# Altium PCB 6C-4L-1550um.PcbDoc
Units mm, origin at the board's own origin, x right, y up, seen from the top; angles counter-clockwise.
Board outline 63.83 x 29.23 mm, 4 copper layers (Top Layer, Mid-Layer 1, Mid-Layer 2, Bottom Layer), stack 1.536 mm thick; 82 components, 63 nets, 283 pads, 116 vias.
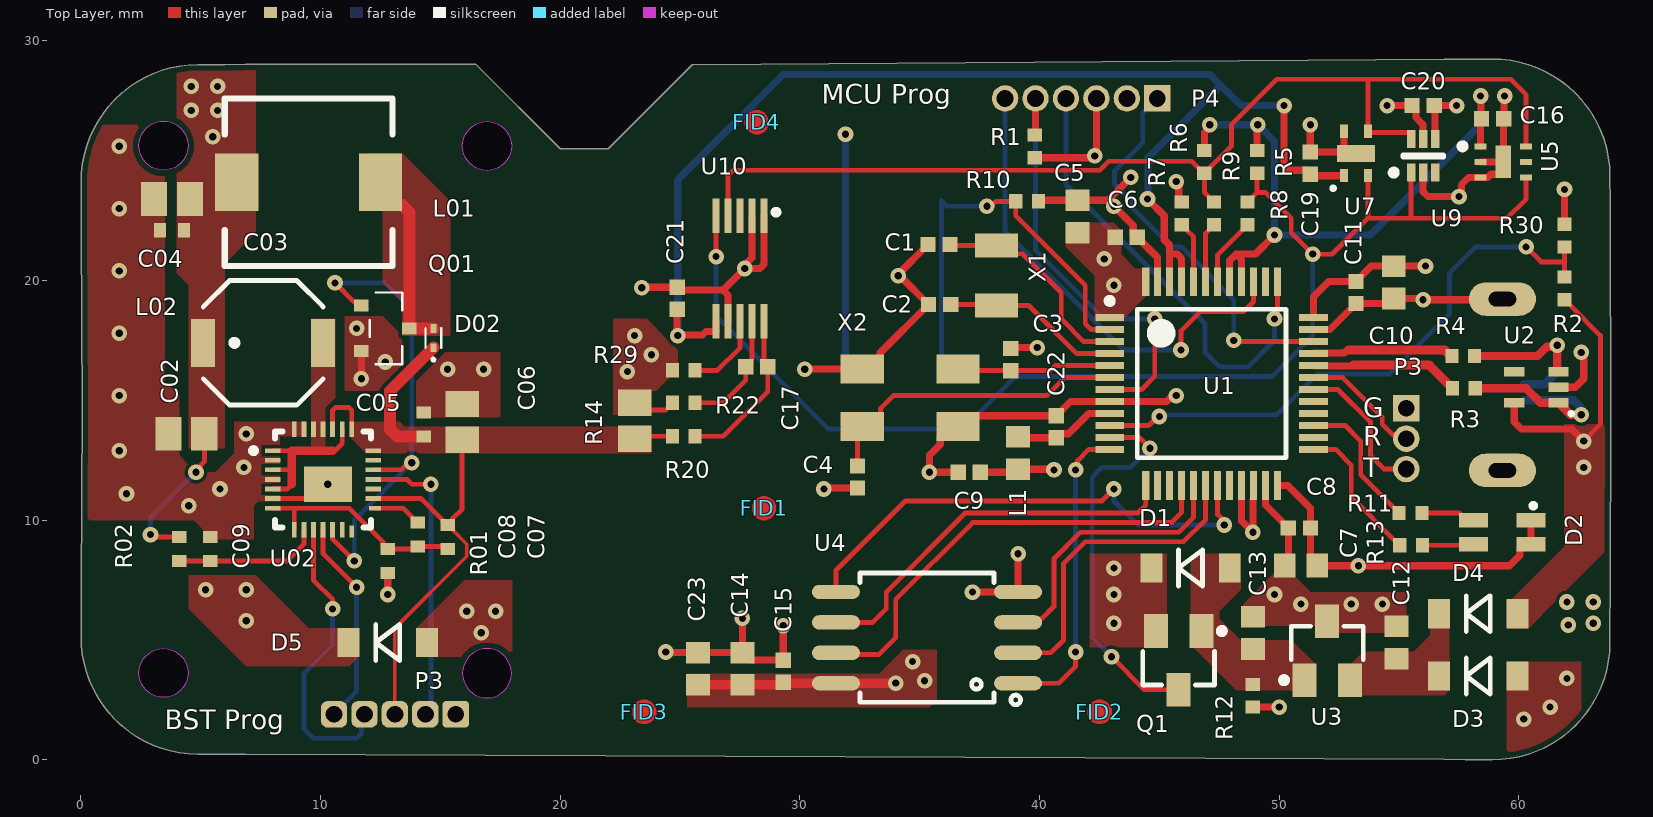
[diagram p0: Top Layer view]
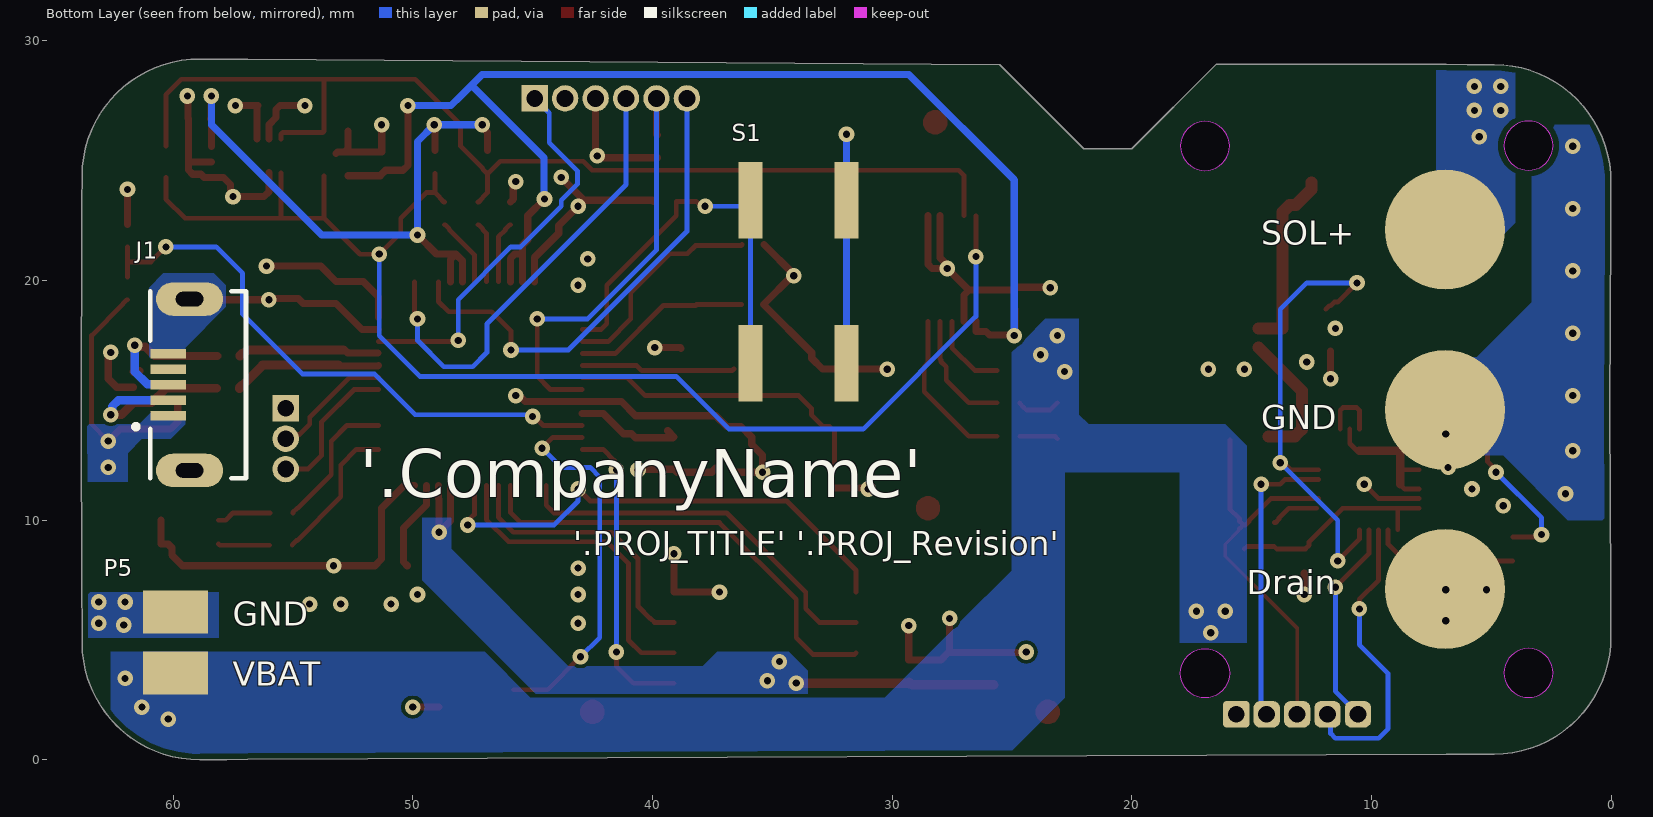
[diagram p1: Bottom Layer view, seen from below]
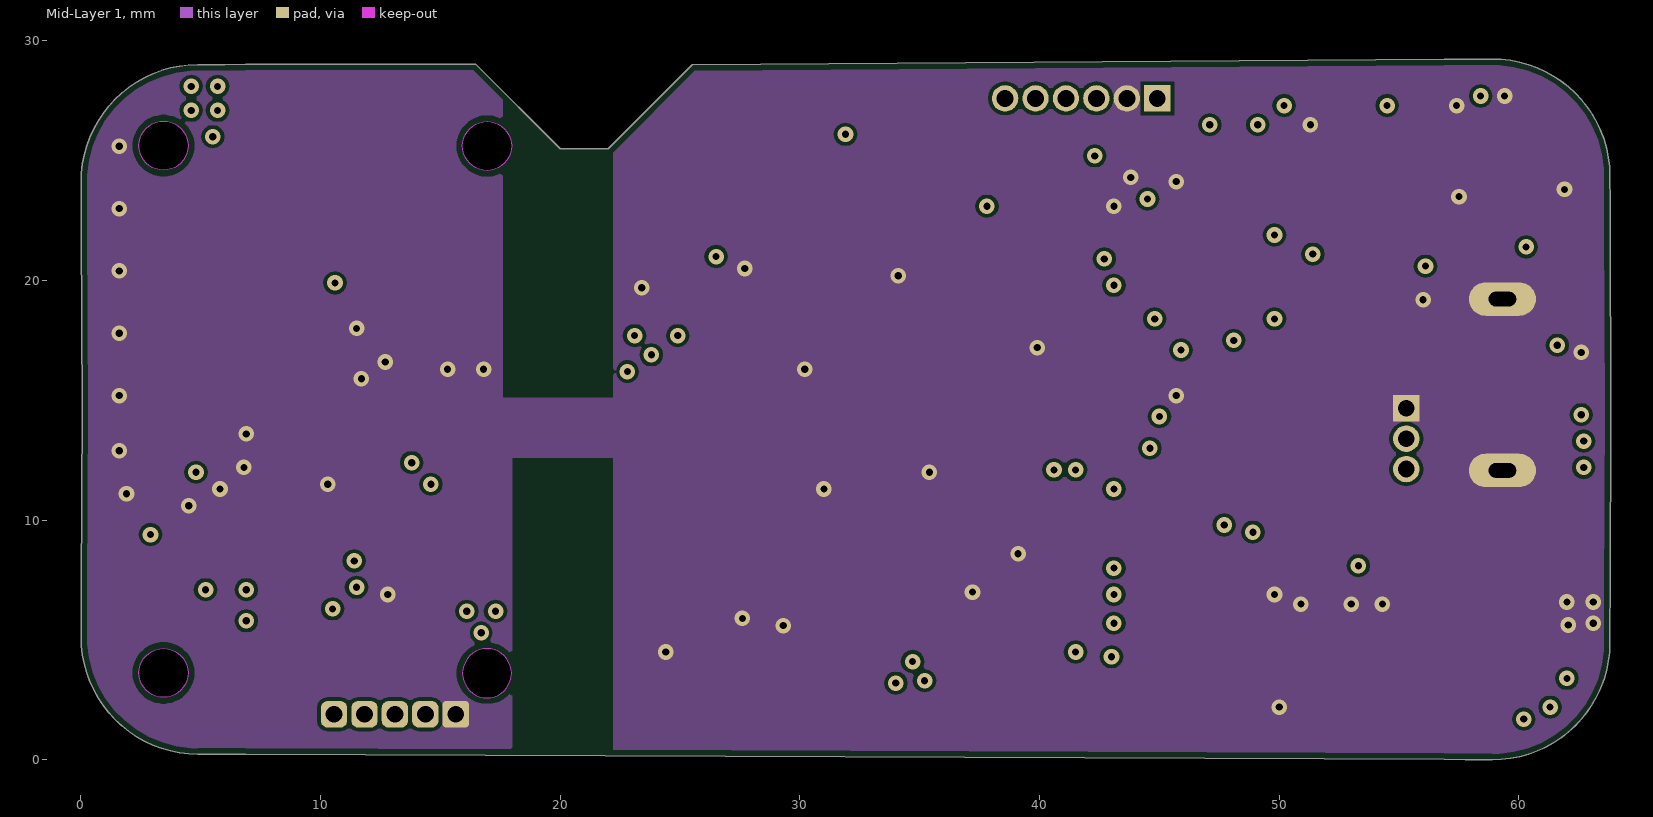
[diagram p2: Mid-Layer 1]
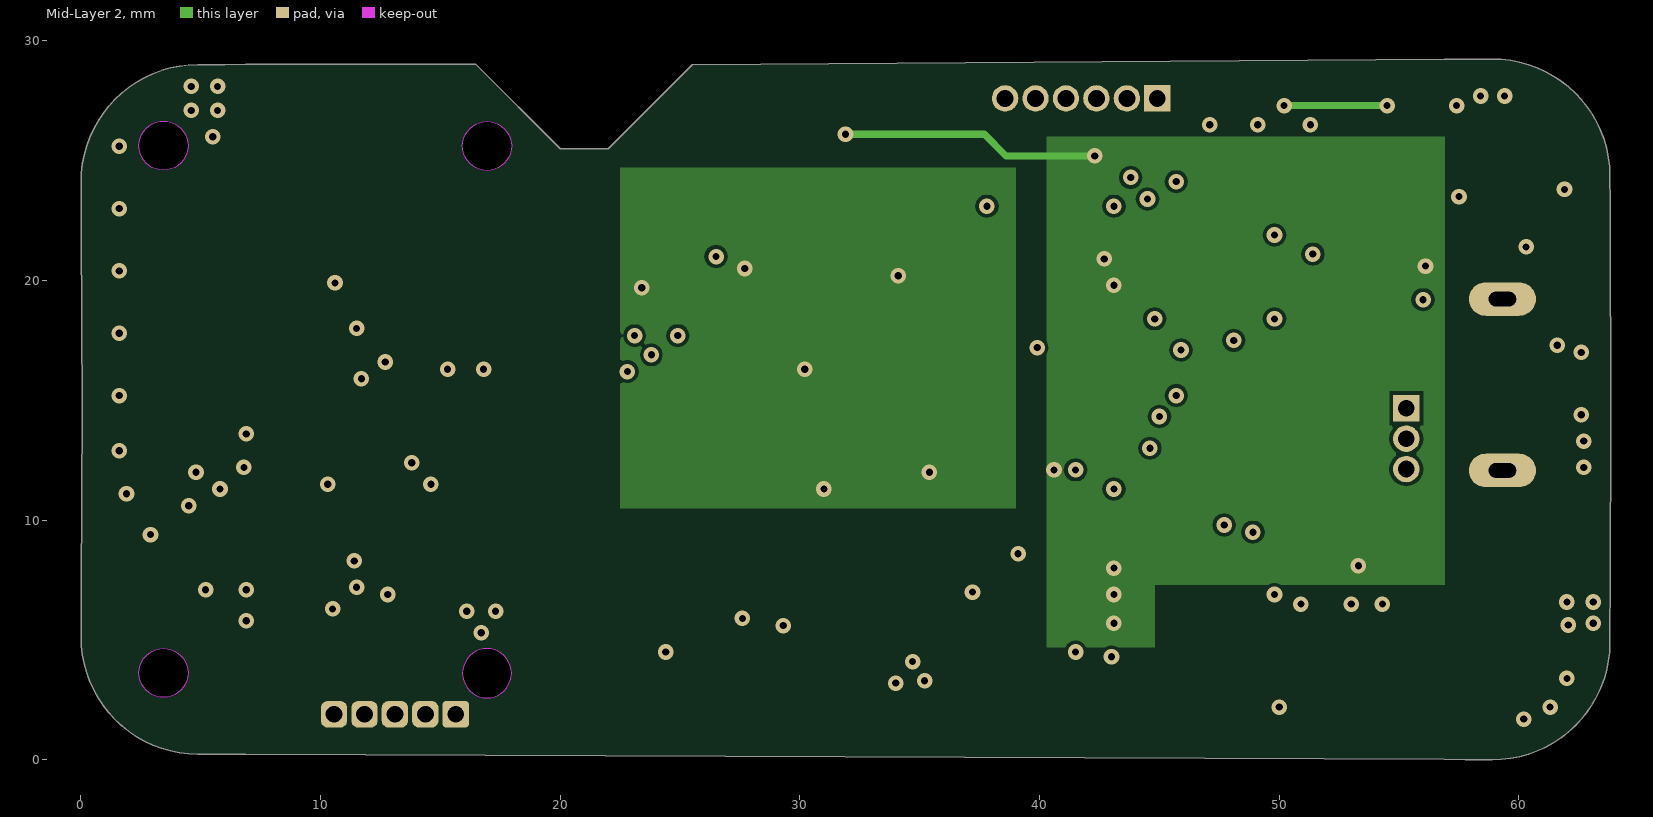
[diagram p3: Mid-Layer 2]

## Layer stack, top to bottom
Top Solder: solder mask 0.0102, Solder Resist, Dk 3.5
Top Layer: signal copper 0.018
Dielectric1: prepreg 0.36, FR-4, Dk 4.8
Mid-Layer 1: signal copper 0.035
Dielectric2: core 0.71, FR-4, Dk 4.8
Mid-Layer 2: signal copper 0.035
Dielectric3: prepreg 0.36, FR-4, Dk 4.8
Bottom Layer: signal copper 0.018
Bottom Solder: solder mask 0.0102, Solder Resist, Dk 3.5

## Board outline
0.006,5.149 0.013,6.268 0.017,7.151 0.049,14.622 0.017,22.093 0.012,23.216 0.006,24.095 cw(c4.896,24.119) 4.878,29.009 5.998,29.011 6.881,29.015 6.878,29.018 ccw(c6.881,29.018) 6.884,29.018 16.482,29.018 20,25.5 22,25.5 25.503,29.003 56.881,29.227 58.004,29.232 58.883,29.237 cw(c58.907,24.348) 63.797,24.365 63.799,23.246 63.803,22.363 63.836,14.622 63.803,6.881 63.799,5.757 63.797,4.878 cw(c58.907,4.896) 58.883,0.006 57.764,0.013 56.881,0.017 6.881,0.229 5.757,0.233 4.878,0.235 cw(c4.896,5.125)
cut-out: 3.444,2.602 cw(c3.444,3.627) 2.419,3.627 cw(c3.444,3.627) 3.444,4.652 cw(c3.444,3.627) 4.469,3.627 cw(c3.444,3.627)
cut-out: 15.919,3.613 ccw(c16.944,3.613) 16.944,2.588 ccw(c16.944,3.613) 17.969,3.613 ccw(c16.944,3.613) 16.944,4.638 ccw(c16.944,3.613)
cut-out: 16.944,24.588 cw(c16.944,25.613) 15.919,25.613 cw(c16.944,25.613) 16.944,26.638 cw(c16.944,25.613) 17.969,25.613 cw(c16.944,25.613)
cut-out: 3.444,24.603 cw(c3.444,25.628) 2.419,25.628 cw(c3.444,25.628) 3.444,26.653 cw(c3.444,25.628) 4.469,25.628 cw(c3.444,25.628)

## Design rules (kind name [scope] priority, off if disabled: settings)
BoardOutlineClearance [All] p1: gap=0.25 ignorepadtopadclearanceinfootprint=FALSE except(0: Arc-SplitContinuation Track-SplitContinuation SMDPad-SplitContinuation THPad-SplitContinuation Via-SplitContinuation Fill-SplitContinuation Poly-SplitContinuation Region-SplitContinuation Text-SplitContinuation)
Clearance Clearance-xPP-xTP-xTT [All] p1: gap=0.15 ignorepadtopadclearanceinfootprint=FALSE except(0: Arc-Hole Track-Hole SMDPad-Hole THPad-Hole Via-Hole Fill-Hole Poly-Hole Region-Hole Text-Hole)
ComponentClearance [All] p1: gap=0.25 collisioncheckmode=3 verticalgap=0.25 showdistances=FALSE
DiffPairsRouting [All] p1: maxlimit=0.25 minlimit=0.25 mostfreqgap=0.25 toplayer_minwidth=0.2 toplayer_maxwidth=0.381 toplayer_prefwidth=0.381 midlayer1_minwidth=0.2 midlayer1_maxwidth=0.381 midlayer1_prefwidth=0.381 midlayer2_minwidth=0.2 midlayer2_maxwidth=0.381 midlayer2_prefwidth=0.381 bottomlayer_minwidth=0.2 bottomlayer_maxwidth=0.381 bottomlayer_prefwidth=0.381 maxuncoupledlength=12.5
Height [All] p1: minheight=0 maxheight=25 prefheight=12.5
HoleSize HoleSize-PTH [All] p1: absolutevalues=TRUE maxlimit=2 minlimit=0.25 maxpercent=80.000 minpercent=20.000
HoleToHoleClearance [All] p1: gap=0.35 allowstackedmicrovias=TRUE
MinimumAnnularRing "Minimum IAR  >0.45mm" [((ObjectKind = 'Pad') OR (ObjectKind = 'Via')) And (Layer = 'MultiLayer') And (HoleDiameter > AsMM(0.45))] p1: minimumring=0.175 // minimum inner annular ring for pads > 0.45mm finished hole size
MinimumAnnularRing "Minimum IAR <=0.45mm" [((ObjectKind = 'Pad') OR (ObjectKind = 'Via')) And (Layer = 'MultiLayer') And (HoleDiameter <= AsMM(0.45))] p2: minimumring=0.175 // minimum inner annular ring for pads <= 0.45mm finished hole size
MinimumSolderMaskSliver [All] p1: minsoldermaskwidth=0.08
PlaneClearance PlaneClearance-IPI [All] p1: clearance=0.25
PlaneConnect [All] p1: planeconnectstyle=Relief reliefexpansion=0.175 reliefentries=4 reliefconductorwidth=0.2 reliefairgap=0.2
PolygonConnect PolygonConnect-xTW [All] p1: connectstyle=Direct reliefconductorwidth=0.2 reliefentries=4 polygonreliefangle="90 Angle" airgapwidth=0.2
RoutingCorners [All] p1: cornerstyle=45-Degree minsetback=2.5 maxsetback=2.5
RoutingVias "RoutingVias > 0.45mm" [(ObjectKind = 'Via') And (HoleDiameter > AsMM(0.45))] p1: holewidth=0.5 width=0.85 viastyle="Through Hole" minholewidth=0.5 minwidth=0.85 maxholewidth=0.9 maxwidth=1.25 // finishet hole size > 0.45mm
RoutingVias "RoutingVias <= 0.45mm" [(ObjectKind = 'Via') And (HoleDiameter <= AsMM(0.45))] p2: holewidth=0.3 width=0.65 viastyle="Through Hole" minholewidth=0.25 minwidth=0.6 maxholewidth=0.45 maxwidth=0.8 // finishet hole size <= 0.45mm
SilkToSilkClearance [All] p1: silktosilkclearance=0.2
SilkToSolderMaskClearance SilkscreenOverComponentPads [IsPad] p1: minsilkscreentomaskgap=0.2 clearancetoexposedcopper=TRUE
SolderMaskExpansion [All] p1: expansion=0 istentingtop=FALSE
UnRoutedNet [All] p1: checkbadconnections=TRUE
Width Width-xTW [All] p1: maxlimit=1.5 minlimit=0.15 preferedwidth=0.2
18 further rules are at their usual default settings.

## Classes and differential pairs
differential pair USB: +USB_P -USB_N

## Components (designator, comment, footprint, x,y, rotation, side; value= is the part's Value field where it differs from the comment)
C1 "" CAP0402 35.8,21.5 r0 top
C2 "" CAP0402 35.825,19 r0 top
C02 "Cap_0805" 0805 4.4,13.6 r0 top value=22uF
C3 "" CAP0402 38.8,16.7 r270 top
C03 "Cap_0805" 0805 3.8,23.4 r0 top value=22uF
C4 "" CAP0402 32.4,11.8 r90 top
C04 "Cap_0402" 0402 3.8,22.1 r0 top value=100nF
C5 "" CAP0603 41.575,22.676 r270 top
C05 "Cap_0402" 0402 14.3,14 r270 top value=100nF
C6 "" CAP0402 43.615,21.801 r180 top
C06 "Cap_0805" 0805 15.9,14.1 r270 top value=22uF
C7 "" CAP0603 50.9,8.1 r0 top
C07 "Cap_0402" 0402 15.301,9.3 r90 top value=100nF
C8 "" CAP0402 50.84,9.675 r0 top
C08 "Cap_0402" 0402 14.05,9.4 r90 top value=470nF
C9 "" CAP0402 37.06,12 r0 top
C09 "Cap_0402" 0402 5.4,8.8 r270 top value=100nF
C10 "" CAP0603 54.775,19.925 r90 top
C11 "" CAP0402 53.2,19.5 r90 top
C12 "" CAP0603 54.9,4.9 r270 top
C13 "" CAP0603 48.9,5.3 r270 top
C14 "" CAP0603 27.6,3.8 r270 top
C15 "" CAP0402 29.3,3.7 r270 top
C16 "" CAP0402 58.9,26.75 r180 top
C17 "" CAP0402 28.2,16.4 r0 top
C19 "" CAP0402 51.288,24.9 r270 top
C20 "" CAP0402 56,27.3 r180 top
C21 "" CAP0402 24.875,19.26 r270 top
C22 "" CAP0402 40.7,13.9 r270 top
C23 "" CAP0603 25.75,3.8 r270 top
D1 "Alternative ON BAT54T1GOSCT-ND" "SOD123 SODFL360X130-2N" 46.3,8 r180 top
D2 "" KPTBD-3216SURKCGKC 58.1,10 r0 top
D02 "NSR0140P2" SOD-923 14.7,17.2 r90 top
D3 "Alternative ON BAT54T1GOSCT-ND" "SOD123 SODFL360X130-2N" 58.3,3.5 r180 top
D4 "Alternative ON BAT54T1GOSCT-ND" "SOD123 SODFL360X130-2N" 58.3,6.1 r180 top
D5 "Alternative ON BAT54T1GOSCT-ND" "SOD123 SODFL360X130-2N" 12.8,4.9 r180 top
FID1 "Fiducial" FIDUCIAL_02_small 28.5,10.5 r90 top
FID2 "Fiducial" FIDUCIAL_02_small 42.5,2 r90 top
FID3 "Fiducial" FIDUCIAL_02_small 23.5,2 r90 top
FID4 "Fiducial" FIDUCIAL_02_small 28.2,26.6 r90 top
J1 "USB3140-30-0170-1-C_REVE1" GCT_USB3140-30-0170-1-C_REVE1 58.95,15.65 r90 bottom
L1 "" CAP0603 39.1,12.8 r90 top
L01 "SRR7045-102M" SRR7045-102M 6.5,24.1 r0 top value=X
L02 "SD53-4R7-R" SD53-4R7-R 7.6,17.4 r0 top value=X
P3 "" "Header 1x3 1.27" 55.3,14.67 r270 top
P3 "1x5 Header" "1x5 Header 1.27" 15.64,1.9 r180 top
P4 "" "Header 1x6 1.27" 44.91,27.6 r180 top
P5 "" "2x1 blank pads_2" 59.9,4.9 r90 bottom
Q1 "" SOT23-3 45.8,4 r270 top
Q01 "PMV130ENE" SOT-23 11.7,18.95 r270 top
R1 "" RES0402 39.8,25.6 r270 top
R01 "Res_0402" 0402 12.8,8.3 r270 top value=0
R2 "" RES0402 61.9,19.675 r270 top
R02 "Res_0402" 0402 4.1,8.8 r270 top value=51K
R3 "" RES0402 57.7,15.5 r0 top
R4 "" RES0402 57.675,16.85 r0 top
R5 "" RES0402 49.075,24.951 r90 top
R6 "" RES0402 46.875,24.951 r90 top
R7 "" RES0402 45.925,22.801 r270 top
R8 "" RES0402 48.674,22.801 r270 top
R9 "" RES0402 47.275,22.801 r270 top
R10 "" RES0402 39.475,23.3 r180 top
R11 "" RES0402 55.475,10.3 r180 top
R12 "" RES0402 48.9,2.675 r90 top
R13 "" RES0402 55.5,8.95 r180 top
R14 "Res_0805" 0805 23.1,14.15 r270 top value=1K
R20 "" RES0402 25.15,13.5 r0 top
R22 "" RES0402 25.15,14.9 r0 top
R29 "" RES0402 25.15,16.25 r0 top
R30 "" RES0402 61.9,21.875 r270 top
S1 "" EVQQ2W02W 31.9,16.55 r90 bottom
U1 "" TSQFP50P900X900X160-48N 47.175,15.701 r0 top
U2 "" "SC-70 5L" 61.65,14.9 r90 top
U02 "Sunboost 3" 28-QFN_0.4mm 8,12.9 r0 top
U3 "" SOT23-3 52,4.7 r90 top
U4 "" SO_8_W 35.3,5.1 r180 top
U5 "" OPT3001 58.4,25.6 r0 top
U7 "" SHTC3 52.7,24.375 r0 top
U9 "" SOTFL50P160X60-6N 56,25.2 r90 top
U10 "" VSSOP-10 27.5,20.6 r270 top
X1 "" FC-135 38.2,21.457 r270 top
X2 "" ABM3B 34.6,15.107 r180 top

## Footprints (in the part's own frame and the unit in brackets; to place one, negate y for a bottom-side part, rotate by r counter-clockwise, add the part's x,y. Pads: shape width x height; smd on the part's side, far side on the other; paste and mask are expansions set on the pad)
"1x5 Header 1.27" [mm]
  rrect25% 1.1x1.1 hole 0.7 paste+0 mask+0: 1(0,0)
  rrect50% 1.1x1.1 hole 0.7 paste+0 mask+0: 2(1.27,0) 3(2.54,0) 4(3.81,0) 5(5.08,0)
"2x1 blank pads_2" [mm]
  rect 1.8x2.7 smd: 1(-1.27,0) 2(1.27,0)
28-QFN_0.4mm [mm]
  rect 0.65x0.2 smd mask+0.05: 1(0,0) 2(0,-0.4) 3(0,-0.8) 4(0,-1.2) 5(0,-1.6) 6(0,-2) 7(0,-2.4) 16(4.2,-2) 17(4.2,-1.6) 18(4.2,-1.2) 19(4.2,-0.8) 20(4.2,-0.4) 21(4.2,0)
  rect 0.2x0.65 smd mask+0.05: 8(0.9,-3.3) 9(1.3,-3.3) 10(1.7,-3.3) 11(2.1,-3.3) 12(2.5,-3.3) 13(2.9,-3.3) 22(3.3,0.9) 23(2.9,0.9) 24(2.5,0.9) 25(2.1,0.9) 26(1.7,0.9) 27(1.3,0.9) 28(0.9,0.9)
  rect 0.2x0.5 smd mask+0.05: 14(3.3,-3.375)
  rect 0.5x0.2 smd mask+0.05: 15(4.275,-2.4)
  rect 2x1.5 smd mask+0.05: 29(2.3,-1.4)
  silkscreen extent -0.9,-3.2 4.1,0.8, body extent 0.1,-3.2 4.1,0.8, height 0.75
0402 [mm]
  rect 0.5x0.6 smd mask+0.05: 1(-0.5,0) 2(0.5,0)
  body extent -0.5,-0.25 0.5,0.25, height 0.25
0805 [mm] "Chip Capacitor, Body 2.0x1.3mm, IPC High Density"
  rect 1.1x1.4 smd: 1(-0.75,0) 2(0.75,0)
  body extent -1.1,-0.72 1.1,0.72, height 1.4
ABM3B [mm]
  rect 1.8x1.2 smd: 1(-2,-1.2) 2(2,-1.2) 3(2,1.2) 4(-2,1.2)
  body extent -2.5,-1.6 2.5,1.6, height 1.1
CAP0402 [mm]
  rect 0.64x0.64 smd: 1(-0.46,0) 2(0.46,0)
  body extent -0.55,-0.3 0.55,0.3, height 0.6
CAP0603 [mm]
  rect 0.9x1 smd: 1(-0.675,0) 2(0.675,0)
  body extent -0.87,-0.48 0.87,0.47, height 0.85
EVQQ2W02W [mm]
  rect 3.2x1 smd: 1(0,0) 2(6.8,0) 3(6.8,4) 4(0,4)
  body extent 0,-1 6.5,5, height 2.5
FC-135 [mm]
  rect 1x1.8 smd: 1(0,0) 2(2.5,0)
  body extent -0.35,-0.75 2.85,0.75, height 0.8
FIDUCIAL_02_small [mm]
  Top Layer region: 0,-0.5 -0.099,-0.5 -0.283,-0.424 -0.424,-0.283 -0.5,-0.099 -0.5,0 -0.5,0.099 -0.424,0.283 -0.283,0.424 -0.099,0.5 0,0.5 0.099,0.5 0.283,0.424 0.424,0.283 0.5,0.099 0.5,0 0.5,-0.099 0.424,-0.283 0.283,-0.424 0.099,-0.5 0,-0.5
  Top Layer pour cut-out: 0,-1 -0.098,-1 -0.292,-0.962 -0.474,-0.886 -0.637,-0.777 -0.777,-0.637 -0.886,-0.474 -0.962,-0.292 -1,-0.098 -1,0 -1,0.098 -0.962,0.292 -0.886,0.474 -0.777,0.637 -0.637,0.777 -0.474,0.886 -0.292,0.962 -0.098,1 0,1 0.098,1 0.292,0.962 0.474,0.886 0.637,0.777 0.777,0.637 0.886,0.474 0.962,0.292 1,0.098 1,0 1,-0.098 0.962,-0.292 0.886,-0.474 0.777,-0.637 0.637,-0.777 0.474,-0.886 0.292,-0.962 0.098,-1 0,-1
GCT_USB3140-30-0170-1-C_REVE1 [mm]
  rect 0.4x1.5 smd: 1(-1.3,1.25) 2(-0.65,1.25) 3(0,1.25) 4(0.65,1.25) 5(1.3,1.25)
  oval 1.4x2.8 hole 0.6 slot 1.15 at 90 deg mask+0: S1(-3.575,0.36) S2(3.575,0.36)
  silkscreen extent -3.9,-2 3.9,2.7
"Header 1x3 1.27" [mm]
  rect 1.1x1.1 hole 0.7: 1(0,0)
  round 1.1 hole 0.7: 2(1.27,0) 3(2.54,0)
"Header 1x6 1.27" [mm]
  rect 1.1x1.1 hole 0.7: 1(0,0)
  round 1.1 hole 0.7: 2(1.27,0) 3(2.54,0) 4(3.81,0) 5(5.08,0) 6(6.35,0)
KPTBD-3216SURKCGKC [mm]
  rect 1.2x0.6 smd: 1(2.4,0) 2(0,0) 3(2.4,-1) 4(0,-1)
  silkscreen extent 2.4,0.5 2.6,0.7, body extent -0.4,-1.3 2.8,0.3, height 1.8
OPT3001 [mm]
  rect 0.5x0.25 smd: 1(0,0) 2(0,-0.65) 3(0,-1.3) 4(1.9,-1.3) 5(1.9,-0.65) 6(1.9,0)
  rect 0.65x1.35 smd: 7(0.95,-0.65)
  silkscreen extent -0.87,-0.12 -0.63,0.12, body extent -0.05,-1.65 1.95,0.35, height 0.62
RES0402 [mm]
  rect 0.55x0.6 smd: 1(-0.475,0) 2(0.475,0)
  body extent -0.55,-0.3 0.55,0.3, height 0.4
"SC-70 5L" [mm]
  rect 0.4x0.85 smd: 1(0,0) 2(0.65,0) 3(1.3,0) 4(1.3,1.85) 5(0,1.85)
  silkscreen extent -0.51,-0.58 -0.4,-0.47, body extent -0.45,0.25 1.75,1.6, height 1.1
SD53-4R7-R [mm]
  rect 1x2 smd mask+0.05: 1(-2.5,0) 2(2.5,0)
  silkscreen extent -2.5,-2.6 2.5,2.6, body extent -2.6,-2.6 2.6,2.6, height 3
SHTC3 [mm]
  rect 0.35x0.55 smd: 1(0,0) 2(1,0) 3(1,1.85) 4(0,1.85)
  rect 1.6x0.7 smd: 5(0.5,0.925)
  silkscreen extent -0.51,-0.58 -0.4,-0.47, body extent -0.5,-0.07 1.5,1.93, height 0.75
SO_8_W [mm]
  oval 2x0.6 smd: 1(-3.8,1.905) 2(-3.8,0.635) 3(-3.8,-0.635) 4(-3.8,-1.905) 5(3.8,-1.905) 6(3.8,-0.635) 7(3.8,0.635) 8(3.8,1.905)
  silkscreen extent -3.9,-2.7 2.8,2.8, body extent -4.05,-2.73 4.05,2.73, height 1.75
"SOD123 SODFL360X130-2N" [mm]
  rect 0.91x1.22 smd: 1(-1.635,0) 2(1.635,0)
  silkscreen extent -0.5,-0.75 0.5,0.75, body extent -1.4,-0.85 1.4,0.85, height 1.3
SOD-923 [mm]
  rect 0.36x0.25 smd mask+0.05: 1(0,0) 2(0.8,0)
  silkscreen extent -0.52,-0.33 0.8,0.33, body extent -0.12,-0.32 0.93,0.32, height 0.43
SOT23-3 [mm]
  rect 1.4x1 smd: 1(-1.375,0.95) 2(-1.375,-0.95) 3(1.075,0)
  silkscreen extent -1.5,-1.5 0.87,1.93, body extent -1.7,-1.5 1.3,1.5, height 1.1
SOT-23 [mm]
  rect 0.5x0.6 smd mask+0.05: 1(0,0) 2(1.9,0) 3(0.95,2)
  silkscreen extent -0.55,0.35 2.45,1.7, body extent -0.55,-0.25 2.45,2.25, height 1.1
SOTFL50P160X60-6N [mm]
  rect 0.75x0.35 smd: 1(-0.7,0.5) 2(-0.7,0) 3(-0.7,-0.5) 4(0.7,-0.5) 5(0.7,0) 6(0.7,0.5)
  silkscreen extent -0.82,-0.85 0.05,1.35, body extent -0.85,-0.85 0.85,0.85, height 0.6
SRR7045-102M [mm]
  rect 1.8x2.4 smd mask+0.05: 1(0,0) 2(6,0)
  silkscreen extent -0.5,-3.5 6.5,3.5, body extent -0.5,-3.5 6.5,3.5, height 4.5
TSQFP50P900X900X160-48N [mm]
  rect 1.2x0.3 smd: 1(-4.25,2.75) 2(-4.25,2.25) 3(-4.25,1.75) 4(-4.25,1.25) 5(-4.25,0.75) 6(-4.25,0.25) 7(-4.25,-0.25) 8(-4.25,-0.75) 9(-4.25,-1.25) 10(-4.25,-1.75) 11(-4.25,-2.25) 12(-4.25,-2.75) 25(4.25,-2.75) 26(4.25,-2.25) 27(4.25,-1.75) 28(4.25,-1.25) 29(4.25,-0.75) 30(4.25,-0.25) 31(4.25,0.25) 32(4.25,0.75) 33(4.25,1.25) 34(4.25,1.75) 35(4.25,2.25) 36(4.25,2.75)
  rect 0.3x1.2 smd: 13(-2.75,-4.25) 14(-2.25,-4.25) 15(-1.75,-4.25) 16(-1.25,-4.25) 17(-0.75,-4.25) 18(-0.25,-4.25) 19(0.25,-4.25) 20(0.75,-4.25) 21(1.25,-4.25) 22(1.75,-4.25) 23(2.25,-4.25) 24(2.75,-4.25) 37(2.75,4.25) 38(2.25,4.25) 39(1.75,4.25) 40(1.25,4.25) 41(0.75,4.25) 42(0.25,4.25) 43(-0.25,4.25) 44(-0.75,4.25) 45(-1.25,4.25) 46(-1.75,4.25) 47(-2.25,4.25) 48(-2.75,4.25)
  silkscreen extent -4.37,-3.1 3.1,3.57, body extent -3.5,-3.5 3.5,3.5, height 1.6
VSSOP-10 [mm]
  rect 1.45x0.3 smd: 1(-2.1,1) 2(-2.1,0.5) 3(-2.1,0) 4(-2.1,-0.5) 5(-2.1,-1) 6(2.3,-1) 7(2.3,-0.5) 8(2.3,0) 9(2.3,0.5) 10(2.3,1)
  silkscreen extent -2.35,1.4 -2.15,1.6, body extent -2.35,-1.5 2.55,1.5, height 1.15

## Part data
C1 C2 C3 C4 C6 C8 C9 C11 C15 C16 C17 C19 C20 C21 C22: library part Cap, "Capacitor", Package=0402
  C1 C2: Specification=12p/10V
  C3 C4: Specification=18p/10V
  C6 C8 C9 C11 C15 C16 C17 C19 C20 C21 C22: Specification=100n/10V
C02 C03 C04 C05 C06 C07 C08 C09: "Capacitor", LatestRevisionDate=17-Jul-2002, LatestRevisionNote="Re-released for DXP Platform.", PackageDescription="Radial Cap, Thru-Hole; 2 Leads; 0.3 in Pin Spacing", PackageReference=RAD-0.3, Published=8-Jun-2000, Publisher="Altium Limited"
C5 C7 C10 C12 C13 C14 C23: library part Cap, "Capacitor", Package=0603
  C5 C7 C10 C12 C13: Specification=10µ/10V
  C14 C23: Specification=1µ/10V
D1 D3 D4 D5: library part "D Schottky", "Schottky Diode", Manufacturer=NEXPERIA, Manufacturer PN=BAT54GW, Package=SOD123, Specification=BAT54GW
D2: library part LED_RG, "Red/green LED", Manufacturer=KINGBRIGHT, Manufacturer PN=KPTBD-3216SURKCGKC, Package=SMD, Specification=KPTBD-3216SURKCGKC
D02: "Typical INFRARED GaAs LED", LatestRevisionDate=08-Jul-2005, LatestRevisionNote="Mech Layer 1 removed.", PackageDescription="LED; 2 Leads", PackageReference=LED-0, Published=8-Jun-2000, Publisher="Altium Limited"
J1: "USB - micro B USB 2.0 Receptacle Connector 5 Position Surface Mount, Through Hole", Package=None, Availability=Warning, Check_prices=https://www.snapeda.com/parts/USB3140-30-0170-1-C/Global%20Connector%20Technology/view-part/222535/?ref=eda, DigiKey-Purchase-URL=https://snapeda.com/shop?store=DigiKey&id=222535, MF="Global Connector Technology", MP=USB3140-30-0170-1-C, Price=None, SnapEDA_Link=https://www.snapeda.com/parts/USB3140-30-0170-1-C/Global%20Connector%20Technology/view-part/222535/?ref=snap
L1: library part Inductor, "Inductor", Manufacturer=MURATA, Manufacturer PN=BLM18AG601SN1D, Package=0603, Specification="600R 0.5A"
L01 L02: "Inductor"
P3: library part "Header 3", "Header, 3-Pin", Package=Hole, Specification="1.27 pitch"
P4: library part "Header 6", "Header, 6-Pin", Package=Hole, Specification="1.27 pitch"
P5: library part "Header 2", "Header, 2-Pin", Package=SMD, Specification="SMD Pads"
Q1: library part MOSFET-P, "P-Channel MOSFET", Manufacturer=ON, Manufacturer PN=FDN342P, Package=SOT-23, Specification=FDN342P
Q01: "N-Channel MOSFET", LatestRevisionDate=17-Jul-2002, LatestRevisionNote="Re-released for DXP Platform.", PackageDescription="TO, Flat Index; 3 In-Line, Axial Leads; Body Dia. 4.6mm; Lead Dia. 0.5 mm (max)", PackageReference=E3, PackageVersion=1995/1996, Published=8-Jun-2000, Publisher="Altium Limited"
R1 R2 R3 R4 R5 R6 R7 R8 R9 R10 R11 R12 R13 R20 R22 R29 R30: library part Res2, "Resistor", Package=0402
  R1 R2 R7 R10 R12 R30: Specification=10k
  R3 R4 R8 R9: Specification=0R
  R5 R6: Specification=4k7
  R11 R13: Specification=270R
  R20 R22: Specification=5R1
  R29: Specification=10R
R01 R02 R14: "Resistor", LatestRevisionDate=17-Jul-2002, LatestRevisionNote="Re-released for DXP Platform.", PackageDescription="Axial Device, Thru-Hole; 2 Leads; 0.4 in Pin Spacing", PackageReference=AXIAL-0.4, Published=8-Jun-2000, Publisher="Altium Limited"
S1: library part SW_EVQQ2, "Switch", Manufacturer=PANASONIC, Manufacturer PN=EVQQ2W02W, Package=SMD, Specification=EVQQ2W02W
U1: library part STM32L412CB_2, "MCU", Manufacturer=ST, Manufacturer PN=STM32L412CBT6, Package=LQFP-48, Specification=STM32L412CBT6
U2: library part RClamp0503F, "TVS array USB", Manufacturer=SEMTECH, Manufacturer PN=RClamp0503F.TCT, Package=SC70-5L, Specification=RClamp0503F
U02: "Initvation Sunboost 3"
U3: library part MCP1810TxxxTT, "3V3 LDO low iq", Manufacturer=MICROCHIP, Manufacturer PN=MCP1810T33ITT, Package=SOT23, Specification=MCP1810T33ITT
U4: library part MX25R6435F_SO8, "ULTRA LOW POWER, 64M-BIT FLASH MEMORY", Manufacturer=Macronix, Manufacturer PN=MX25R6435FM2IL0, Package=SOIC-8, Specification=MX25R6435F
U5: library part OPT3001, "Lux sensor", Manufacturer=TI, Manufacturer PN=OPT3001DNP, Package=DNP-6, Specification=OPT3001
U7: library part SHTC3, "SHTC3 RH sensor", Manufacturer=SENSIRION, Package=DFN, Manufacturer PN=SHTC3, Specification=SHTC3
U9: library part TMP112A, "Temp_Sensor", Manufacturer=TI, Manufacturer PN=TMP112AIDR, Package=SOT-563, Specification=TMP112
U10: "Current and power monitor", Manufacturer=TI, Manufacturer PN=INA226AIDGS, Package=VSSOP10, Specification=INA226A
X1: "32.768 kHz Crystal", Manufacturer=EPSON, Manufacturer PN="FC-135 32.7680KA-A5", Package=SMD, Specification="32.768 kHz"
X2: "Crystal", Manufacturer=ABRACON, Manufacturer PN=ABM3B-8.000MHZ-B2-T, Package=SMD, Specification="8 MHz"

## Free pads (board coordinates)
  round 5 smd far side: 4(6.925,22.125) 5(6.925,14.6) 6(6.925,7.125)

## Via types
v1: diameter 0.65, hole 0.3, Top Layer to Bottom Layer, tented both sides, 114 vias
v2: diameter 0.65, hole 0.3, Top Layer to Bottom Layer, 2 vias

## Nets (pads, with @x,y where several pads share a name; then routed paths per layer and width w, separated by ;. In a path a pad name is that pad's centre, name@x,y a point inside that pad or via, vN(x,y) a via of type N, cw(c..) or ccw(c..) an arc to the next point about the centre after c; other vN are vias at no path point)
5V_USB: D4.1 J1.1 R2.2 U2.5 | length 10.9
  Top Layer w0.2: R2.2 61.925,19.2 62.1,19.025 62.1,19 63.4,17.7 63.4,14 v1(62.7,13.3)
  Top Layer w0.3: U2.5 59.8,14.1 60.1,13.8 62.2,13.8 v1(62.7,13.3)
  other v1: 62.7,12.2
ACTIVATE_IV_MEASn: U1.20
BAT_Drain: D5.2 pad.6
  other v1: 6.9,5.8 5.2,7.1 6.9,7.1
BAT_MEAS: Q1.3 U1.11 | length 16
  Top Layer w0.2: U1.11 44.149,13.451 v1(44.6,13) ; v1(43,4.3) 44.375,2.925 Q1.3
  Bottom Layer w0.2: v1(43,4.3) 42.2,5.1 42.2,11.8 42.6,12.2 43.8,12.2 v1(44.6,13)
BUTTON: R10.2 S1.3 S1.4 U1.2 | length 17.5
  Top Layer w0.2: v1(37.8,23.1) 37.976,23.1 38.176,23.3 R10.2 39,22.7 41.9,19.8 41.9,18.2 42.149,17.951 U1.2
  Bottom Layer w0.2: S1.4 S1.3 36.15,23.1 v1(37.8,23.1)
DGND: C07.1 C08.1 R01.1 U02.7 U02.8 | length 9.1
  Top Layer w0.2: U02.7 8.9,10.5 ; U02.8 8.9,10.5 ; C07.1 15.201,8.9 C08.1 13.95,8.8 R01.1 12.75,8.8 12.6,8.95 12.6,9.1 11.2,10.5 8.9,10.5
EXT_BAT: D3.1 D5.1 P5.1 R14.1 R22.1 R29.1 | length 1.8
  Top Layer w0.2: R14.1 23.4,14.6 24.4,14.6 24.5,14.7 24.675,14.875 R22.1
  other v1: 60.2,1.7 61.3,2.2 62,3.4 16.7,5.3 16.1,6.2 17.3,6.2 22.8,16.2 23.8,16.9 23.1,17.7
FLASH_CS: U1.12 U4.1 | length 12.9
  Top Layer w0.2: U4.1 40.795,3.195 41.5,3.9 v1(41.5,4.5) ; v1(41.5,12.1) 41.586,12.186 41.586,12.486 42.051,12.951 U1.12
  Bottom Layer w0.2: v1(41.5,4.5) v1(41.5,12.1) v1@41.55,12.05
FLASH_SCLK: U1.13 U4.6 | length 16.2
  Top Layer w0.2: U4.6 33.035,5.735 33.6,6.3 33.6,7 36.9,10.3 44.1,10.3 44.425,10.625 U1.13
FLASH_SIO0: U1.19 U4.5 | length 21.2
  Top Layer w0.2: U4.5 31.5,7.9 34.4,10.8 42.6,10.8 v1(43.1,11.3) ; U1.19 47.425,10.242 47.7,9.967 v1(47.7,9.8)
  Bottom Layer w0.2: v1(43.1,11.3) 43.1,10.8 44.1,9.8 v1(47.7,9.8)
FLASH_SIO1: U1.18 U4.2 | length 13.4
  Top Layer w0.2: U4.2 40.465,4.465 41,5 41,8.2 41.9,9.1 46,9.1 46.925,10.025 U1.18
FLASH_SIO2: U1.17 U4.3 | length 11.6
  Top Layer w0.2: U4.3 39.908,5.735 40.065,5.892 40.092,5.892 40.6,6.4 40.6,8.4 41.7,9.5 45.8,9.5 46.425,10.125 U1.17
FLASH_SIO3: U1.16 U4.7 | length 19
  Top Layer w0.2: U4.7 31.565,4.4 33.3,4.4 34,5.1 34,6.7 37.2,9.9 45.5,9.9 45.925,10.325 U1.16
GND: C1.1 C2.1 C02.1 C03.1 C3.1 C04.1 C4.1 C5.1 C05.1 C6.1 C06.1 C7.1 C8.1 C9.1 C09.1 C10.1 C11.1 C12.1 C13.1 C14.1 C15.1 C16.1 C19.1 C20.1 C21.1 C22.1 C23.1 J1.5 J1.S1 J1.S2 P3.1 P4.2 P5.2 pad.5 Q01.2 R01.2 R7.1 R10.1 R12.1 R30.1 U1.8 U1.23 U1.35 U1.47 U2.2 U02.2 U02.4 U02.6 U02.27 U02.28 U02.29 U3.3 U4.4 U5.2 U5.3 U5.7 U7.4 U7.5 U9.2 U9.4 U10.1 U10.2 U10.7 X2.2 X2.4 | length 94.9
  Top Layer w0.2: U02.6 9.7,10.9 v1(10.3,11.5)
  Top Layer w0.3: v1(11.7,15.9) Q01.2 ; v1(12.8,6.9) R01.2 ; v1(23.4,19.7) 23.42,19.72 C21.1 24.995,19.6 26.8,19.6 ; v1(24.4,4.5) 24.425,4.475 C23.1 C14.1 ; U10.7 27,19.4 26.8,19.6 ; v1(27.6,5.9) C14.1 ; U10.2 28,20.949 27.7,20.649 v1(27.7,20.5) ; U10.1 28.5,20.676 28.331,20.507 27.707,20.507 v1(27.7,20.5) ; v1(29.3,5.6) C15.1 27.965,4.16 27.65,4.475 C14.1 ; v1(30.2,16.3) 30.207,16.307 X2.2 32.9,16.307 33.35,16.757 33.35,16.985 C2.1 34.165,20.2 v1(34.1,20.2) 34.1,20.26 C1.1 ; v1(31,11.3) 31.04,11.34 C4.1 ; C9.1 v1(35.4,12) 35.4,12.707 35.85,13.157 35.85,13.457 36.3,13.907 X2.4 36.9,13.907 37.353,14.36 C22.1 41.291,14.951 U1.8 45.302,14.951 45.551,15.2 v1(45.7,15.2) ; v1(37.2,7) 37.205,7.005 U4.4 v1(39.1,8.6) ; C3.1 38.84,17.2 v1(39.9,17.2) ; R10.1 40.001,23.351 C5.1 42.851,23.351 v1(43.8,24.3) ; v1(43.1,23.1) 43.905,22.295 43.905,21.971 C6.1 44.925,20.951 U1.47 ; v1(45.7,24.125) 45.805,24.02 45.805,23.395 R7.1 ; R12.1 v1(50,2.2) ; U1.23 49.425,10.63 C8.1 50.38,8.255 C7.1 ; v1(51.3,26.5) 51.288,26.488 C19.1 U7.5@52.84,25.36 ; U1.35 52.111,17.951 C11.1 54.565,19.04 C10.1 55.95,19.25 v1(56,19.2) 59.285,19.2 J1.S2 ; U7.4 52.7,25.5 U7.5@52.84,25.36 ; U7.5 53.14,25.36 U7.5@52.84,25.36 ; U9.2 56,23.7 56.2,23.5 v1(57.5,23.5) 57.605,23.605 57.605,24.005 57.9,24.3 U5.3 58.7,24.3 58.832,24.432 59.175,24.432 59.35,24.607 U5.7 ; U9.4 56.5,27.26 C20.1 v1(57.4,27.3) ; U5.2 U5.7 ; v1(59.4,27.7) 59.38,27.68 59.38,26.77 C16.1 59.35,26.74 U5.7 ; U2.2 62.35,15.55 62.7,15.9 62.7,16.9 v1(62.6,17) ; R30.1 v1(61.9,23.8) ; 26.8,19.6 v1(27.7,20.5)
  other v1: 62.057,5.627 63.1,5.7 50.9,6.5 53,6.5 54.3,6.5 62,6.584 63.1,6.584 49.8,6.9 4.5,10.6 1.9,11.1 5.8,11.3 6.8,12.2 1.6,12.9 6.9,13.6 1.6,15.2 15.3,16.3 16.8,16.3 12.7,16.6 1.6,17.8 11.5,18 1.6,20.4 1.6,23 1.6,25.6
I2C1_SCL: R5.1 R8.1 U5.4 U7.2 U9.1 U10.5 | length 55.6
  Top Layer w0.2: v1(26.5,21) U10.5 ; R8.1 48.699,23.276 48.874,23.451 48.874,23.476 49.075,23.676 ; R5.1 49.075,23.676 ; U7.2 53.7,22.6 ; U9.1 55.5,22.6 ; U5.4 60.3,23.4 59.5,22.6 55.5,22.6 ; 49.075,23.676 49.424,23.676 50.5,22.6 50.5,22 v1(51.4,21.1) 52.2,21.1 53.7,22.6 ; 53.7,22.6 55.5,22.6
  Bottom Layer w0.2: v1(26.5,21) 26.5,18.5 31.2,13.8 36.8,13.8 39,16 49.7,16 51.4,17.7 v1(51.4,21.1)
I2C1_SDA: R6.1 R9.1 U5.6 U7.3 U9.6 U10.4 | length 45.6
  Top Layer w0.2: U10.4 27,24.383 27.217,24.6 42.513,24.6 42.888,24.975 46.351,24.975 46.85,24.476 R6.1 ; R9.1 47.25,23.276 47.075,23.451 47.075,23.476 46.875,23.676 R6.1 ; U9.6 55.5,26.1 55.425,26.175 53.75,26.175 U7.3 53.7,28.4 ; U5.6 60.3,27.755 59.655,28.4 53.7,28.4 ; R6.1 46.9,24.476 47.075,24.651 47.075,24.676 48,25.601 48,26.5 49.9,28.4 53.7,28.4
I_MEAS: U1.14
ICSP: P3.2@14.37,1.9 U02.18 | length 12.6
  Top Layer w0.2: U02.18 13.6,11.7 13.8,11.5 v1(14.6,11.5)
  Bottom Layer w0.2: P3.2@14.13,2.14 14.37,1.9 14.6,2.13 v1(14.6,11.5) v1@14.57,11.47
ICSPCLK: P3.4 U02.10 | length 12.7
  Top Layer w0.2: U02.10 9.7,7.5 10.5,6.7 v1(10.5,6.3) ; P3.4@11.8,1.87 P3.4
  Bottom Layer w0.2: v1(10.5,6.3) 10.5,4.8 9.3,3.6 9.3,1.3 9.7,0.9 11.5,0.9 11.7,1.1 11.7,1.77 P3.4
ICSPDAT: P3.5 U02.11 | length 8.8
  Top Layer w0.2: U02.11 10.1,8.6 v1(11.5,7.2) ; P3.5 P3.5@10.56,1.995
  Bottom Layer w0.2: P3.5 10.56,1.922 11.5,2.862 v1(11.5,7.2)
LED_Gn: R13.2 U1.25 | length 6
  Top Layer w0.2: U1.25 52.349,12.951 53,12.3 53,10.975 54.825,9.15 54.85,9.15 55.025,8.975 R13.2
LED_Rn: R11.2 U1.27 | length 5.9
  Top Layer w0.2: U1.27 52.749,13.951 53.4,13.3 53.4,11.9 54.8,10.5 54.825,10.5 55,10.325 R11.2
MCU_DEBUG_RX: P3.2@55.3,13.4 U1.31 | length 5.1
  Top Layer w0.2: U1.31 52.649,15.951 54.3,14.3 54.3,14 54.728,13.572 55.128,13.572 P3.2@55.3,13.4
MCU_DEBUG_TX: P3.3@55.3,12.13 U1.30 | length 6.1
  Top Layer w0.2: U1.30 52.449,15.451 53.8,14.1 53.8,12.7 54.37,12.13 P3.3@55.3,12.13
NetC1_2: C1.2 U1.3 X1.1 | length 9
  Top Layer w0.2: C1.2 36.303,21.457 X1.1 38.54,21.117 39.283,21.117 40.9,19.5 40.9,18.4 41.849,17.451 U1.3
NetC2_2: C2.2 U1.4 X1.2 | length 7.5
  Top Layer w0.2: C2.2 38.157,19 X1.2 39.543,18.957 41.549,16.951 U1.4
NetC3_2: C3.2 U1.5 X2.1 | length 6.4
  Top Layer w0.2: X2.1 36.667,16.24 C3.2 40.44,16.24 40.651,16.451 U1.5
NetC4_2: C4.2 U1.6 X2.3 | length 13.1
  Top Layer w0.2: C4.2 32.4,13.707 X2.3 32.862,13.907 33.362,14.407 33.362,14.669 33.893,15.2 40.3,15.2 41.051,15.951 U1.6
NetC08_2: C08.2 U02.15 | length 2.1
  Top Layer w0.2: U02.15 13.45,10.5 13.85,10.1 13.85,10.05 14,9.9 C08.2
NetC09_2: C09.2 R02.2 U02.9 | length 6.1
  Top Layer w0.2: R02.2 C09.2 8.6,8.3 9.3,9 U02.9
NetC12_2: C12.2 D3.2 D4.2 U3.2
NetC13_2: C13.2 D1.1 Q1.1 R12.2 U3.1
NetC22_2: C22.2 L1.2 U1.9 | length 4.6
  Top Layer w0.3: L1.2@39.36,13.735 L1.2 39.135,13.44 C22.2 40.868,13.608 41.208,13.608 42.051,14.451 U1.9
NetD2_2: D2.2 R11.1 | length 2.3
  Top Layer w0.2: R11.1 57.5,10.3 57.8,10 D2.2
NetD02_2: D02.2 L01.2 Q01.3 | length 7.7
  Top Layer w0.5: L01.2 12.5,23.8 13.15,23.15 13.407,23.15 13.7,22.857 Q01.3 D02.2
NetD2_4: D2.4 R13.1 | length 2.1
  Top Layer w0.2: R13.1 58.05,8.95 D2.4
NetJ1_2: J1.2 R3.2 U2.1 | length 7.7
  Top Layer w0.35: R3.2 60.3,15.5 60.9,14.9 U2.1 62.15,14.4 v1(62.6,14.4)
  Bottom Layer w0.35: J1.2 62.288,15 62.543,14.745 62.543,14.457 v1(62.6,14.4)
NetJ1_3: J1.3 R4.2 U2.3 | length 7.7
  Top Layer w0.35: R4.2 60.775,16.85 61.167,17.243 61.543,17.243 v1(61.6,17.3) 61.6,16.25 U2.3 61.425,16.2 U2.3@61.4,16.225
  Bottom Layer w0.35: J1.3 60.225,15.675 61.075,15.675 61.6,16.2 v1(61.6,17.3)
NetL02_2: L02.2 U02.1 U02.3 U02.5 U02.23 U02.25 U02.26 | length 6.7
  Top Layer w0.2: U02.5 8.6,11.3 8.8,11.5 ; U02.3 8.7,12.1 8.8,12.2 ; U02.1 8.8,12.9 ; 10.5,12.9 10.6,12.9 10.9,13.2 U02.23
  Top Layer w0.35: 8.8,11.5 8.8,12.2 8.8,12.9 10.5,12.9
NetR8_2: R8.2 U1.42 | length 2.9
  Top Layer w0.2: U1.42 47.425,21.076 48.474,22.126 48.474,22.151 48.649,22.326 R8.2
NetR9_2: R9.2 U1.43 | length 2.5
  Top Layer w0.2: U1.43 46.925,21.976 47.075,22.126 47.075,22.151 47.25,22.326 R9.2
NetR29_2: R29.2 U10.8 | length 3.4
  Top Layer w0.2: R29.2 26.55,16.25 27.5,17.2 U10.8
PA15: U1.38
PH3: R7.2 U1.44 | length 2.6
  Top Layer w0.2: R7.2 45.949,22.326 46.125,22.151 46.125,22.126 46.425,21.825 U1.44
PWM: Q01.1 U02.12 U02.19 | length 20.3
  Top Layer w0.2: U02.12 10.5,9.2 v1(11.4,8.3) ; v1(10.6,19.9) 11.4,19.1 11.55,19.1 Q01.1 11.75,18.95 Q01.1@11.9,18.8 ; U02.19 13.358,12.1 13.658,12.4 v1(13.8,12.4)
  Bottom Layer w0.2: v1(10.6,19.9) 12.7,19.9 13.8,18.8 v1(13.8,12.4) 11.4,10 v1(11.4,8.3)
RESET: P4.5 R1.1 U1.7 | length 18.5
  Top Layer w0.2: U1.7 44.251,15.451 44.8,16 v1(44.8,18.4)
  Top Layer w0.3: R1.1 39.83,26.105 P4.5
  Bottom Layer w0.2: P4.5 39.83,21.27 42.7,18.4 v1(44.8,18.4)
SENS_I_+: C17.2 R20.2 U10.10 | length 6.8
  Top Layer w0.2: R20.2 26.8,13.5 28.66,15.36 C17.2 28.5,16.56 U10.10
SENS_I_-: C17.1 R22.2 U10.9 | length 5.1
  Top Layer w0.2: R22.2 26.8,14.9 27.74,15.84 C17.1 27.96,16.62 27.96,16.697 28,16.737 U10.9
Solar+: C02.2 C03.2 C04.2 L01.1 L02.1 pad.4 R02.1 | length 6.4
  Top Layer w0.2: v1(2.9,9.4) 3,9.3 R02.1 ; v1(4.8,12) 4.8,12.092 5.15,12.442 C02.2
  Bottom Layer w0.2: v1(2.9,9.4) 2.9,10.1 v1(4.8,12)
  other v1: 5.5,26 4.6,27.1 5.7,27.1 4.6,28.1 5.7,28.1
SPI2_MOSI: U1.28
SPI2_SCK: U1.26
SWCLK: P4.4 U1.37 | length 19.1
  Top Layer w0.2: v1(49.8,18.4) 49.8,18.576 49.925,18.701 U1.37
  Bottom Layer w0.2: P4.4 41.1,24 46.9,18.2 46.9,17 47.5,16.4 48.7,16.4 49.8,17.5 v1(49.8,18.4)
SWDIO: P4.1 U1.34 | length 16.5
  Top Layer w0.2: v1(48.1,17.5) 48.149,17.451 U1.34
  Bottom Layer w0.2: P4.1 44.3,26.99 44.3,25.755 43.125,24.58 43.125,24.02 43.8,23.345 43.8,23.1 45.5,21.4 45.9,21.4 48.1,19.2 v1(48.1,17.5)
SWO: P4.6 U1.39 | length 20.1
  Top Layer w0.2: v1(45.9,17.1) 45.9,17.9 46.7,18.7 48.5,18.7 48.925,19.125 U1.39
  Bottom Layer w0.2: P4.6 38.56,22.045 43.505,17.1 v1(45.9,17.1)
USB_N: R3.1 U1.32 | length 6.2
  Top Layer w0.2: 53.068,16.432 53.104,16.469
  Top Layer w0.3: U1.32 51.443,16.432 53.068,16.432
  Top Layer w0.381: 53.104,16.469 56.256,16.469 57.115,15.609 57.14,15.609 57.225,15.525 R3.1
USB_P: R4.1 U1.33 | length 6
  Top Layer w0.2: U1.33 U1.33@51.447,16.973 ; 52.701,16.973 52.71,16.982
  Top Layer w0.3: U1.33@51.447,16.973 52.701,16.973 ; 52.701,16.982 52.71,16.982 52.828,17.1 52.9,17.1
  Top Layer w0.381: 52.9,17.1 56.892,17.1 57.033,16.96 57.115,16.96 57.2,16.875 R4.1
USB_SENSE: R2.1 R30.2 U1.10 | length 24.6
  Top Layer w0.2: U1.10 44.551,13.951 44.926,14.326 v1(45,14.326) ; v1(60.3,21.4) 60.925,20.775 61.9,20.775 ; R2.1 61.9,20.775 ; R30.2 61.9,20.775
  Bottom Layer w0.2: v1(45,14.326) 45.074,14.4 49.9,14.4 51.6,16.1 54.6,16.1 57.1,18.6 57.1,20.3 58.2,21.4 v1(60.3,21.4)
V_MEAS: U1.15
VCC: C05.2 C06.2 C07.2 D02.1 P3.3@13.1,1.9 R14.2 R20.1 U02.16 U02.21 U02.22 U02.24 | length 26.7
  Top Layer w0.15: P3.3@13.1,1.9 13.1,5.5 16.1,8.5 16.1,9 15.526,9.574 15.526,9.625 C07.2@15.501,9.65
  Top Layer w0.2: U02.24 10.5,14.583 10.617,14.7 11.183,14.7 11.3,14.583 U02.22 ; U02.16 14.201,10.9 15.101,10 15.101,9.95 15.251,9.8 C07.2 C07.2@15.351,9.8 ; P3.3@13.1,1.9 P3.3@13.133,1.867 ; C07.2@15.501,9.65 C07.2@15.351,9.8 ; C06.2 15.9,10.45 15.501,10.05 15.501,9.95 C07.2@15.351,9.8 ; R14.2 23.2,13.5 R20.1
  Top Layer w0.5: C05.2 13.193,13.5 12.9,13.793 12.9,15.4 D02.1
VDD: C5.2 C6.2 C7.2 C8.2 C9.2 C10.2 C11.2 D1.2 D2.1 D2.3 L1.1 P4.3 Q1.2 R1.2 S1.1 S1.2 U1.1 U1.24 U1.36 U1.48 | length 49.5
  Top Layer w0.3: C9.2@37.353,12.167 C9.2 38.975,12 L1.1 40.575,12.125 v1(40.6,12.1) ; R1.2 42.225,25.125 v1(42.3,25.2) 42.37,25.27 P4.3 ; U1.24 50.349,11.451 51.3,10.5 C8.2 51.3,8.375 C7.2 v1(53.3,8.1) 59.6,8.1 60.05,8.55 60.05,8.85 60.2,9 D2.3 D2.1 ; U1.36 51.425,19.325 52.06,19.96 C11.2 53.84,20.6 C10.2 v1(56.1,20.6)
  Mid-Layer 2 w0.3: v1(31.9,26.1) 37.7,26.1 38.6,25.2 v1(42.3,25.2)
  Bottom Layer w0.3: S1.1 S1.2 v1(31.9,26.1)
  other v1: 43.1,5.7 43.1,6.9 43.1,8 43.1,19.8 42.7,20.9
VDD_FLASH: C14.2 C15.2 C23.2 U1.21 U1.22 U4.8 | length 12.4
  Top Layer w0.3: U1.21 48.425,9.975 v1(48.9,9.5) 48.9,10.888 48.925,10.913 U1.22
  Top Layer w0.4: C23.2 C14.2 29.185,3.125 C15.2 29.345,3.195 U4.8 31.505,3.2 v1(34,3.2)
  other v2: 35.2,3.3 34.7,4.1
VDD_SENSORS_FAST: C19.2 C20.2 C21.2 U1.45 U1.46 U7.1 U9.5 U10.6 | length 60.8
  Top Layer w0.3: C21.2 24.875,17.725 25.925,17.725 26.076,17.876 26.5,17.876 U10.6 ; v1(44.5,23.4) 45.2,22.7 45.2,21.7 45.425,21.475 45.425,21.1 ; U1.46 45.425,21.1 ; U1.45 45.925,20.924 45.749,21.1 45.425,21.1 ; v1(50.2,27.3) 50.2,24.8 50.4,24.6 51.128,24.6 C19.2 51.353,24.375 U7.1 ; v1(54.5,27.3) C20.2 55.7,27.14 55.7,26.8 56,26.5 U9.5
  Mid-Layer 2 w0.3: v1(50.2,27.3) v1(54.5,27.3)
  Bottom Layer w0.3: v1(24.9,17.7) 24.9,24.2 29.3,28.6 47.1,28.6 47.55,28.15 ; v1(44.5,23.4) 44.525,23.425 44.525,25.125 47.55,28.15 ; v1(50.2,27.3) 48.4,27.3 48,27.7 47.8,27.9 47.55,28.15
VDD_SENSORS_SLOW: C16.2 R5.2 R6.2 U1.40 U1.41 U5.1 | length 27.4
  Top Layer w0.3: R6.2 46.875,26.18 47.1,26.405 v1(47.1,26.5) ; U1.41 47.925,20.825 48.2,21.1 ; U1.40 48.425,20.875 48.2,21.1 ; R5.2 49.075,26.475 v1(49.1,26.5) ; v1(49.8,21.9) 49,21.1 48.2,21.1 ; U5.1 58.4,26.71 C16.2 58.42,26.77 58.42,27.68 v1(58.4,27.7)
  Bottom Layer w0.3: v1(47.1,26.5) v1(49.1,26.5) 49.8,25.8 v1(49.8,21.9) 53.8,21.9 58.4,26.5 v1(58.4,27.7)
pads on no net: J1.4 U1.29 U2.4 U02.13 U02.14 U02.17 U02.20 U5.5 U9.3 U10.3

## Polygon pours and split planes (outlines as drawn)
EXT_BAT on Top Layer "NONET_L-01_P-001" (solid, pour order 27): 14,5.5 16,7.5 18,7.5 18,4.3 14,4.3
VDD_FLASH on Top Layer "NONET_L-01_P-001" (solid, pour order 33): 33.3,3.6 34.3,4.6 35.7,4.6 35.7,2.5 35.4,2.2 33.3,2.2
VDD_FLASH on Top Layer "NONET_L-01_P-001" (solid, pour order 31): 25.3,3.6 35.4,3.6 35.4,2.2 25.3,2.2
GND on Top Layer "NONET_L-01_P-001" (solid, pour order 30): 11,15.4 12.4,15.4 13.4,16.4 13.4,17.7 12.6,18.5 11,18.5
NetD02_2 on Top Layer "NONET_L-01_P-001" (solid, pour order 29): 12,25.3 12,23.5 12.6,22.9 12.6,19.9 13.4,19.1 13.4,17.7 15.4,17.7 15.4,23.3 13.4,25.3
BAT_Drain on Top Layer "NONET_L-01_P-001" (solid, pour order 28): 11.6,5.5 9.5,5.5 7.3,7.7 4.5,7.7 4.5,6.3 6.9,3.9 11.2,3.9 11.6,4.3
NetL02_2 on Top Layer "NONET_L-01_P-001" (solid, pour order 26): 9.6,18.4 9.6,12.73 9.602,12.727 10.2,12.727 10.2,14.7 10.6,15.1 10.6,18.4
Solar+ on Top Layer "NONET_L-01_P-001" (solid, pour order 7): 4,28.8 7.3,28.8 7.3,22 5.998,20.698 5.998,13 4.5,13 4.5,19.8 4,20.3
GND on Top Layer "NONET_L-01_P-001" (solid, pour order 20): 14,14.3 17.5,14.3 17.5,17 15.2,17 14,15.8
NetC13_2 on Top Layer "NONET_L-01_P-001" (solid, pour order 18): 46.3,4.8 46.3,8.2 46.7,8.6 48.4,8.6 48.4,7.1 47.5,6.2 47.5,5.3 47,4.8
EXT_BAT on Top Layer "E" (solid, pour order 17): 59.5,4.1 62.6,4.1 62.6,-0.1 62.7,-0.2 59.5,-0.2
EXT_BAT on Top Layer "NONET_L-01_P-001" (solid, pour order 14): 22.2,18.4 22.2,14.4 23.8,14.4 23.8,15.4 24,15.4 24.9,16.3 24.9,17.1 23.6,18.4
5V_USB on Top Layer "NONET_L-01_P-001" (solid, pour order 10): 59.5,6.7 59.7,6.7 61.9,8.9 61.9,14 64.6,14 64.6,9.7 60.4,5.5 59.5,5.5
GND on Top Layer "NONET_L-01_P-001" (solid, pour order 9): 3.5,26.5 3.5,15.8 4.1,15.2 4.1,12.7 4.8,12 5.6,12 6.4,12.8 6.4,14.1 9.4,14.1 9.4,13.5 8.3,13.5 8.3,10.8 7.4,10.8 7.2,10.6 7.2,9.2 5.1,9.2 5.1,9.6 4.7,10 -0.8,10 -0.8,26.2 -0.5,26.5
VCC on Top Layer "NONET_L-01_P-001" (solid, pour order 8): 11.2,14.1 13.3,14.1 13.5,13.9 23.8,13.9 23.8,12.8 11.9,12.8 11.2,13.5
GND on Top Layer "NONET_L-01_P-001" (solid, pour order 6): 51.1,7 55.3,7 55.3,5.3 51.8,5.3 51.8,5.5 51.1,6.2
GND on Top Layer "NONET_L-01_P-001" (solid, pour order 5): 48.5,5.6 52.4,5.6 52.4,5.9 50.6,7.7 50.6,8.5 49.8,8.5 49.8,7.8 48.5,6.5
VDD on Top Layer "NONET_L-01_P-001" (solid, pour order 4): 44.5,19.4 43.4,18.3 42.3,18.3 42.3,20.2 41.1,21.4 41.1,22.4 43.1,22.4 43.4,22.1 43.4,21.1 44,20.5 44.5,20.5
VDD on Top Layer "NONET_L-01_P-001" (solid, pour order 3): 45.3,4.7 42.1,4.7 42.1,8.6 45.3,8.6
NetC13_2 on Top Layer "NETC13_2_L01_P002" (solid, pour order 2): 51.5,2.9 48.2,2.9 46.3,4.8 46.3,6 47.4,6 48.4,5 50.5,5 51.5,4
NetC12_2 on Top Layer "NONET_L-01_P-001" (solid, pour order 1): 55.6,4.5 56.3,5.2 56.3,6.7 57.1,6.7 57.1,4.1 55.7,4.1 55.6,4.2
NetC12_2 on Top Layer "NONET_L-01_P-001" (solid, pour order 0): 57.1,4.1 56.7,4.5 53.5,4.5 53,4 52.5,4 52.5,2.7 56.9,2.7 57.1,2.9
VDD_FLASH on Bottom Layer "NONET_L-01_P-001" (solid, pour order 32): 48.4,10.1 49.6,10.1 49.6,7.5 44.8,2.7 33.509,2.7 33.509,3.709 34.3,4.5 37.3,4.5 37.9,3.9 43.5,3.9 48.4,8.8
EXT_BAT on Bottom Layer "NONET_L-01_P-001" (solid, pour order 13): 47,4.5 45.1,2.6 30.3,2.6 25,7.9 25,17 23.6,18.4 22.2,18.4 22.2,14.4 21.8,14 16.1,14 15.2,13.1 15.2,4.878 18,4.878 18,12 22.8,12 22.8,2.6 26.4,-1 60.4,-1 62.6,1.2 62.6,4.5
Solar+ on Bottom Layer "NONET_L-01_P-001" (solid, pour order 25): 5.9,20.5 4,22.4 4,28.8 7.3,28.8 7.3,20.7
GND on Bottom Layer "NONET_L-01_P-001" (solid, pour order 23): 58.1,7 64.5,7 64.5,5.1 58.1,5.1
GND on Bottom Layer "NONET_L-01_P-001" (solid, pour order 19): 7.8,16.8 5.6,16.8 3.3,19.1 3.3,26.5 -0.2,26.5 -0.1,26.4 -0.1,10.1 -0.2,10 1.8,10 4.5,12.7 8.1,12.7
GND on Bottom Layer "NONET_L-01_P-001" (solid, pour order 12): 59.5,17.2 57.8,18.9 57.8,19.8 58.3,20.3 60.4,20.3 61,19.7 61,16.8 59.5,16.8
5V_USB on Bottom Layer "NONET_L-01_P-001" (solid, pour order 11): 59.5,14.5 59.5,14 60.1,13.4 61.3,13.4 61.9,12.8 61.9,11.6 64.3,11.6 64.4,11.7 64.4,14 61.4,14 60.9,14.5
VDD on Mid-Layer 2 "NONET_L-01_P-001" (solid, pour order 22): 44.8,4.7 44.8,7.3 56.9,7.3 56.9,26 40.3,26 40.3,4.7
GND on Mid-Layer 2 "NONET_L-01_P-001" (solid, pour order 24): 22.5,24.7 39,24.7 39,10.5 22.5,10.5
GND on Mid-Layer 1 "NONET_L-01_P-001" (solid, pour order 21): 17.6,29.7 17.6,15.1 22.2,15.1 22.2,29.8 65.2,29.8 65.2,-0.6 22.2,-0.6 22.2,12.6 18,12.6 18,-0.6 -0.9,-0.6 -0.9,29.7

## Silkscreen, mask and mechanical layers (free items; w line width, h text height)
Top Overlay:
  text "MCU Prog" at 30.9,27.367 h0.8
  text "G" at 53.5,14.3 h0.8
  text "R" at 53.5,13.1 h0.8
  text "T" at 53.5,11.8 h0.8
  text "BST Prog" at 3.5,1.267 h0.8
Bottom Overlay:
  text "SOL+" at 14.6,21.5 h1
  text "GND" at 14.6,13.8 h1
  text "'.CompanyName'" at 52.2,10.966 h2
  text "'.PROJ_TITLE' '.PROJ_Revision'" at 43.3,8.533 h1
  text "Drain" at 15.2,6.9 h1
  text "GND" at 57.5,5.6 h1
  text "VBAT" at 57.5,3.1 h1
Mechanical 1:
  circle w0.013: c16.944,25.613 r1.025
  circle w0.013: c3.444,25.628 r1.025
  circle w0.013: c3.444,3.627 r1.025
  circle w0.013: c16.944,3.613 r1.025
  circle w0.013: c13.656,7.129 r2.1
  circle w0.013: c13.642,14.625 r2.1
  circle w0.013: c13.642,22.133 r2.1
  circle w0.013: c6.942,22.125 r2.1
  circle w0.013: c6.942,14.625 r2.1
  circle w0.013: c6.942,7.125 r2.1
  circle w0.013: c6.942,7.125 r2.1
  circle w0.013: c6.942,14.625 r2.1
  circle w0.013: c6.942,22.125 r2.1
  circle w0.013: c13.642,22.133 r2.1
  circle w0.013: c13.642,14.625 r2.1
  circle w0.013: c13.656,7.129 r2.1
  circle w0.013: c6.91,22.122 r2.5
  circle w0.013: c6.942,14.622 r2.5
  circle w0.013: c6.91,7.122 r2.5
  circle w0.013: c6.91,7.122 r2.5
  circle w0.013: c6.942,14.622 r2.5
  circle w0.013: c6.91,22.122 r2.5
  lines w0.013: 4.875,29.012 ccw(c4.878,29.012) 4.882,29.012 ; 5.754,29.014 ccw(c5.757,29.014) 5.76,29.014 ; 6.878,29.018 ccw(c6.881,29.018) 6.884,29.018 16.482,29.018 20,25.5 22,25.5 25.503,29.003 56.881,29.227 58.004,29.232 58.883,29.237 cw(c58.907,24.348) 63.797,24.365 63.799,23.246 63.803,22.363 63.836,14.622 63.803,6.881 63.799,5.757 63.797,4.878 cw(c58.907,4.896) 58.883,0.006 57.764,0.013 56.881,0.017 6.881,0.229 5.757,0.233 4.878,0.235 cw(c4.896,5.125) 0.006,5.149 0.013,6.268 0.017,7.151 0.049,14.622 0.017,22.093 0.012,23.216 0.006,24.095 cw(c4.896,24.119) 4.878,29.009 5.998,29.011 6.881,29.015

## Text inside footprints (layer, text, board x,y; h text height)
D1: Mechanical 29 "A" at 48.288,8.607 h0.7 r180
D3: Mechanical 29 "A" at 60.288,4.107 h0.7 r180
D4: Mechanical 29 "A" at 60.288,6.707 h0.7 r180
D5: Mechanical 29 "A" at 14.788,5.507 h0.7 r180